# EAGLE board DAC breakout (EAGLE 7.4.0)
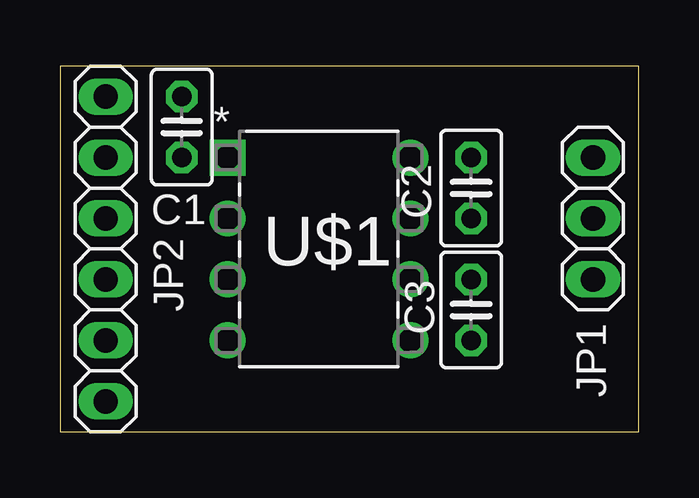
[diagram p0: board, top side]
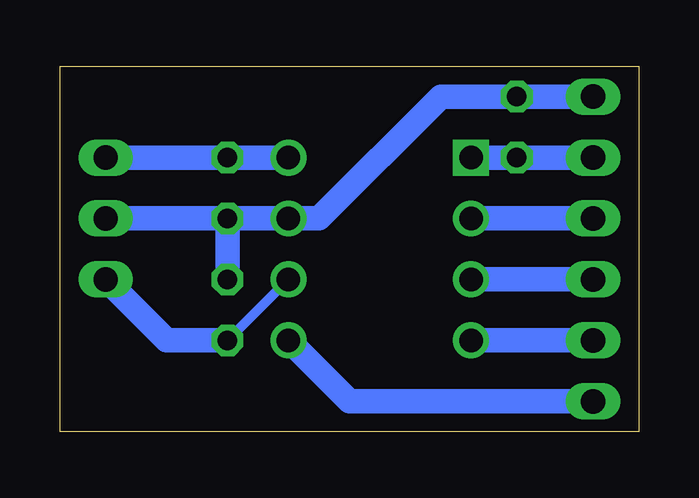
[diagram p1: board, bottom side, seen from below]

Size 24.13 x 15.24 mm. Coordinates in mm from the lower left corner, seen from the top.
Outline: 0,0 24.13,0 24.13,15.24 0,15.24 0,0
Copper layers (1*16): Top 0.035mm / dielectric 1.5mm / Bottom 0.035mm
Design rules "Othermill-DRC-1-32": minimum track width 8mil, minimum drill 0.8mm, track to track 0.794003125mm, track to pad 0.794003125mm, pad to pad 0.794003125mm, via to via 0.794003125mm, smd to smd 0mil, copper to edge 0mil, drill to drill 1mil, minimum pad ring 10mil, minimum via ring 10mil, stop-mask expansion 1mil, vias tented up to drill 30mil, thermal gap 10mil

## Footprints (pad centres in the part's own frame; a part is rotated, then mirrored left to right if it is on the bottom)
C025-025X050 = drill 0.813 octagon: 1 -1.27,0; 2 1.27,0
1X03 = drill 1.016 long: 1 -2.54,0; 2 0,0; 3 2.54,0
1X06 = drill 1.016 long: 1 -6.35,0; 2 -3.81,0; 3 -1.27,0; 4 1.27,0; 5 3.81,0; 6 6.35,0
DIP254P762X432-8 = drill 0.991 square: 1 -7.62,7.62 | drill 0.991: 2 -7.62,5.08; 3 -7.62,2.54; 4 -7.62,0; 5 0,0; 6 0,2.54; 7 0,5.08; 8 0,7.62

## Placement (x,y rotation side)
C1  0.1uF  [C025-025X050]  5.08,12.7 90 top
C2  1uF  [C025-025X050]  17.14,10.16 270 top
C3  1uF  [C025-025X050]  17.14,5.08 90 top
JP1  [1X03]  22.22,8.89 270 top
JP2  [1X06]  1.91,7.62 90 top
U$1  MCP4822-E/P  [DIP254P762X432-8]  14.61,3.81 0 top

## Library data of the parts
C1-C3 = rcl
JP1 JP2 = pinhead
U$1 = Microchip_By_element14_Batch_1; MPN: MCP4822-E/P; OC_FARNELL: 1439413; OC_NEWARK: 11M1705; PACKAGE: DIP-8; SUPPLIER: Microchip

## Nets
GND: C1.2 C2.2 C3.2 JP1.2 JP2.6 U$1.7
N$1: C1.1 JP2.5 U$1.1
N$2: C2.1 JP1.1 U$1.8
N$3: C3.1 JP1.3 U$1.6
N$4: JP2.4 U$1.2
N$5: JP2.3 U$1.3
N$6: JP2.2 U$1.4
N$7: JP2.1 U$1.5

## Tracks (layer width: path | path; a pad name or v marks a point on that pad's centre or on a via)
GND
  Bottom 1.016: JP2.6 C1.2 8.26,13.97 13.34,8.89 U$1.7 C2.2 | C2.2 C3.2 | JP1.2 C2.2
N$1
  Bottom 1.016: JP2.5 C1.1 U$1.1
N$2
  Bottom 1.016: U$1.8 C2.1 JP1.1
N$3
  Bottom 0.406: C3.1 U$1.6
  Bottom 1.016: JP1.3 19.68,3.81 C3.1
N$4
  Bottom 1.016: JP2.4 U$1.2
N$5
  Bottom 1.016: JP2.3 U$1.3
N$6
  Bottom 1.016: JP2.2 U$1.4
N$7
  Bottom 1.016: JP2.1 12.06,1.27 U$1.5